# Altium PCB DA1_ver2.PcbDoc
Units mm, origin at the board's own origin, x right, y up, seen from the top; angles counter-clockwise.
Board outline 80.01 x 75.69 mm, 2 copper layers (Top Layer, Bottom Layer); 63 components, 73 nets, 264 pads, 14 vias.
Unrouted connection lines stored in the file: 2.
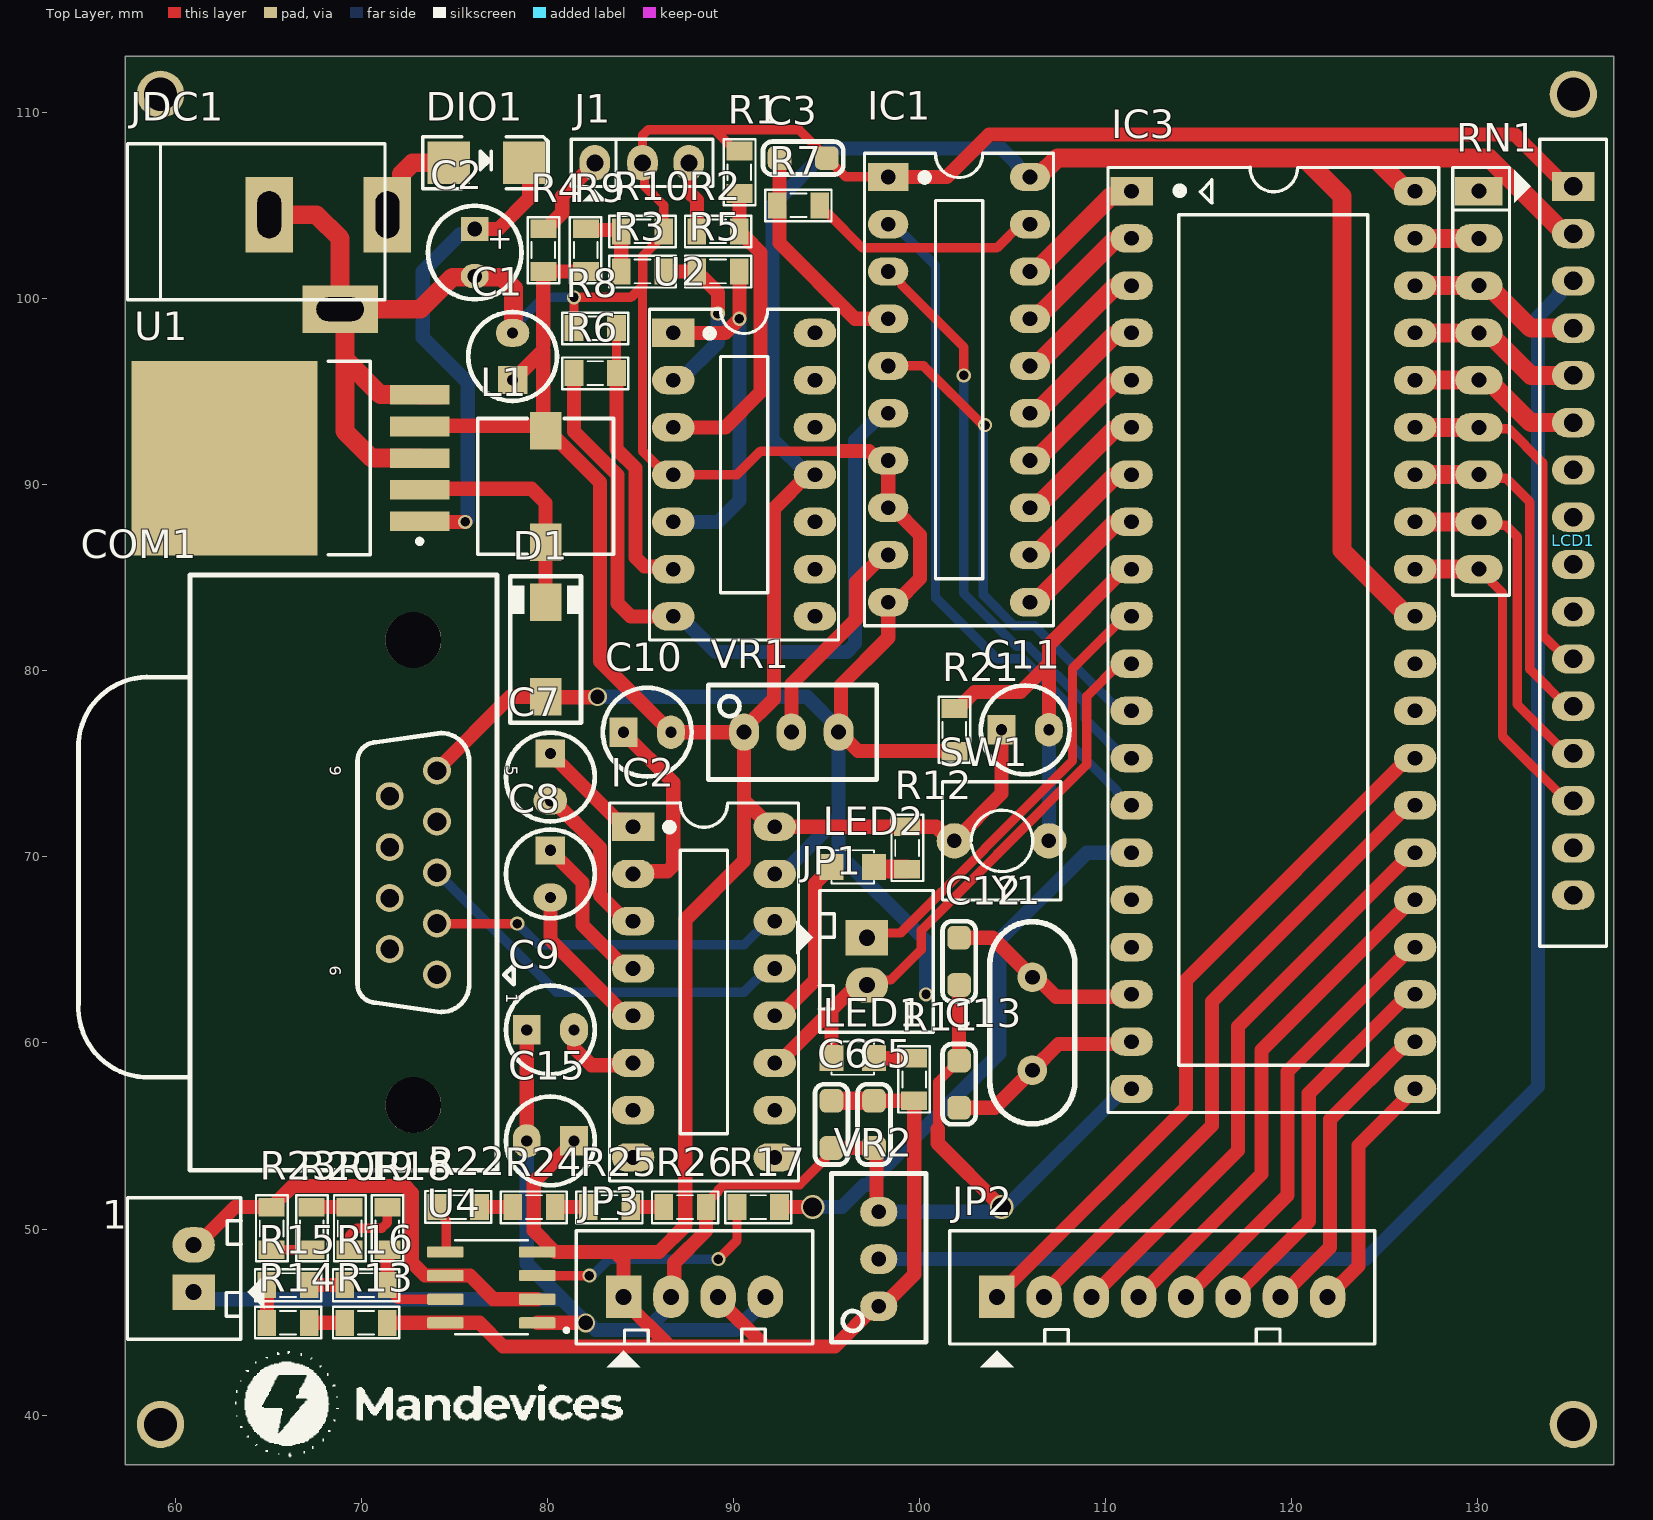
[diagram p0: Top Layer view]
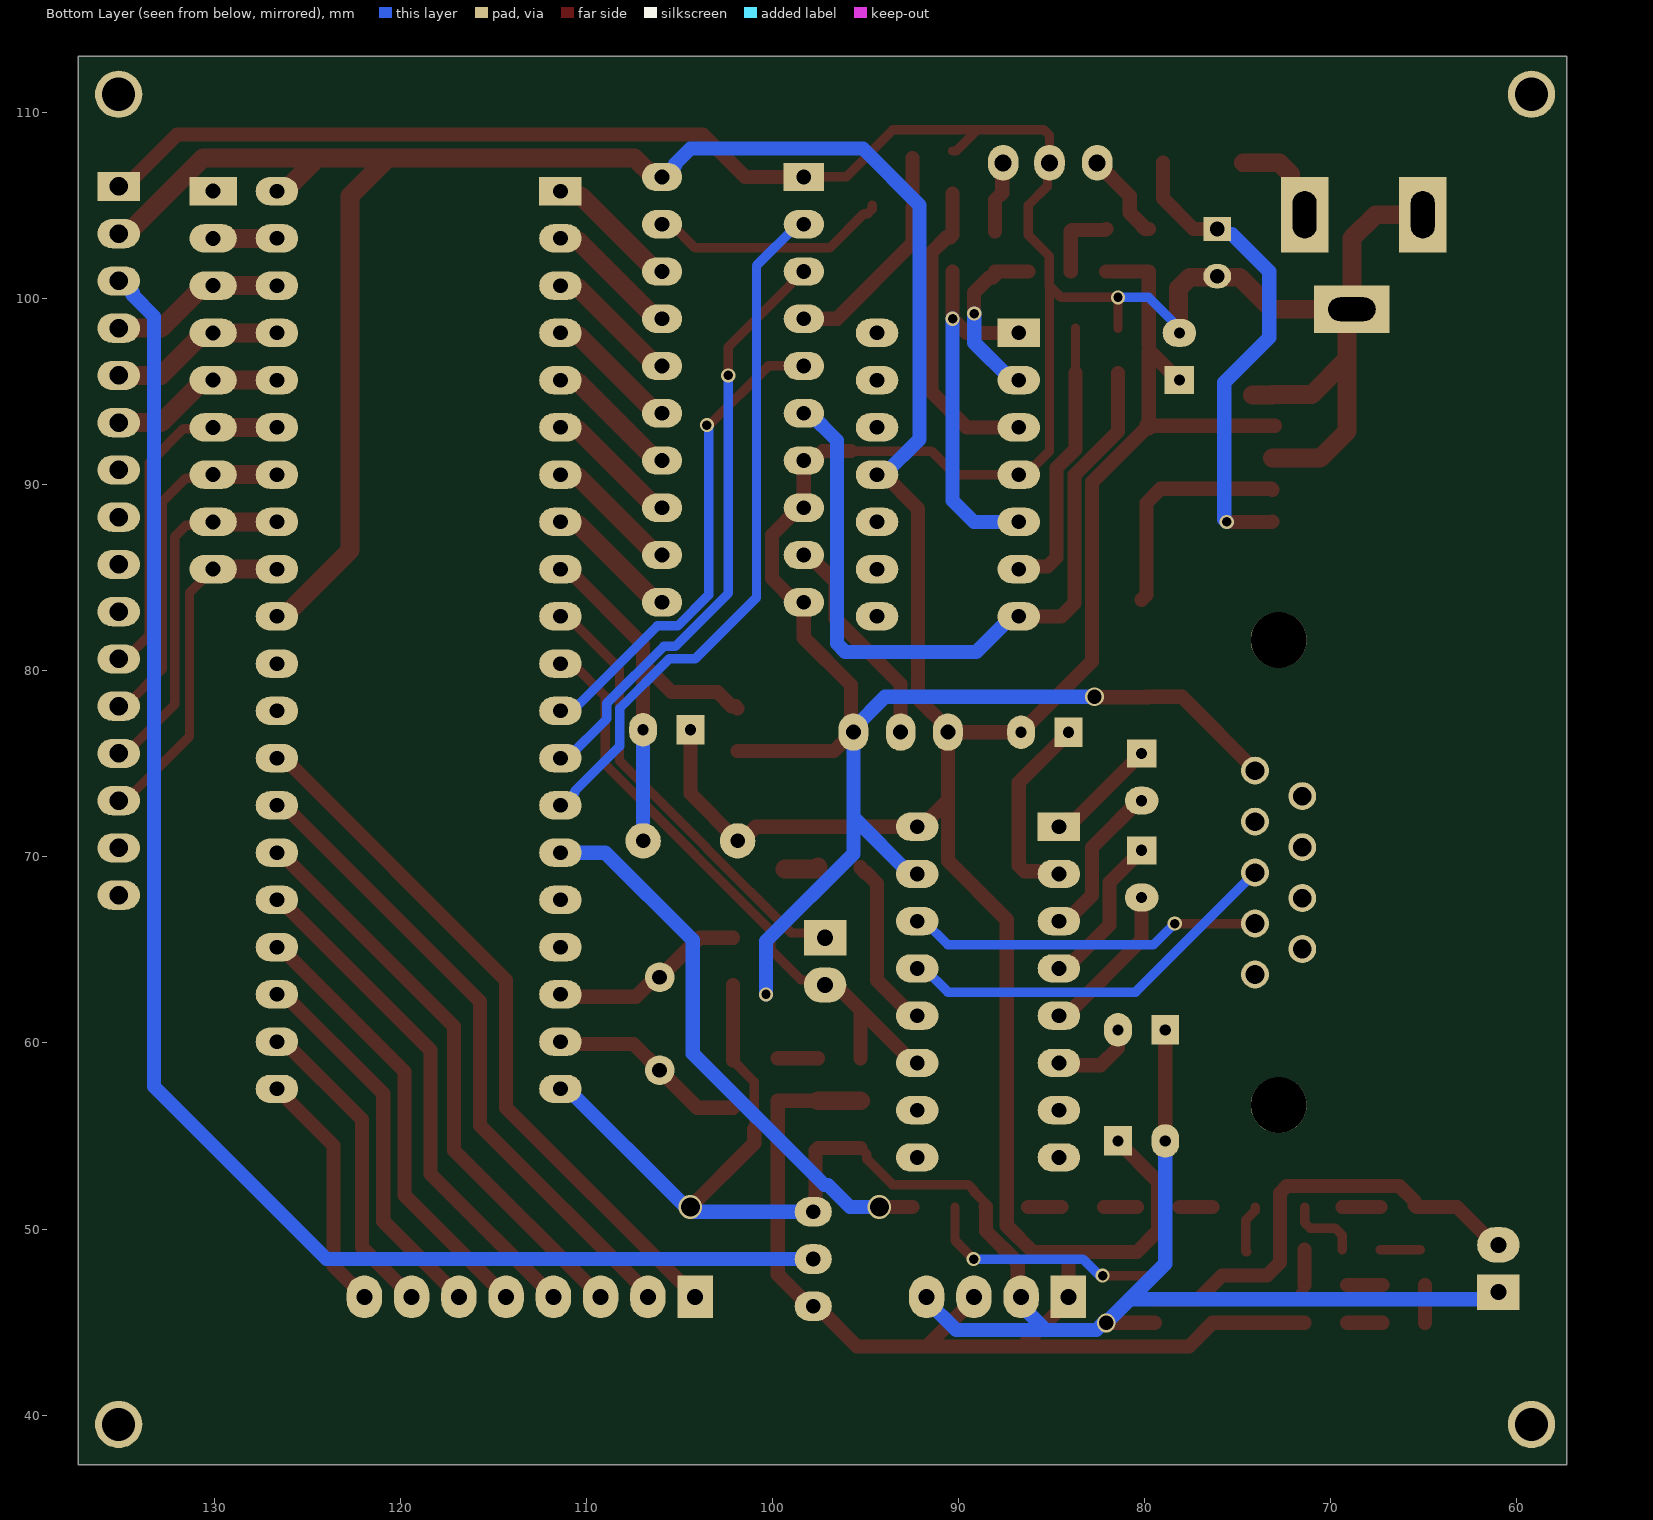
[diagram p1: Bottom Layer view, seen from below]
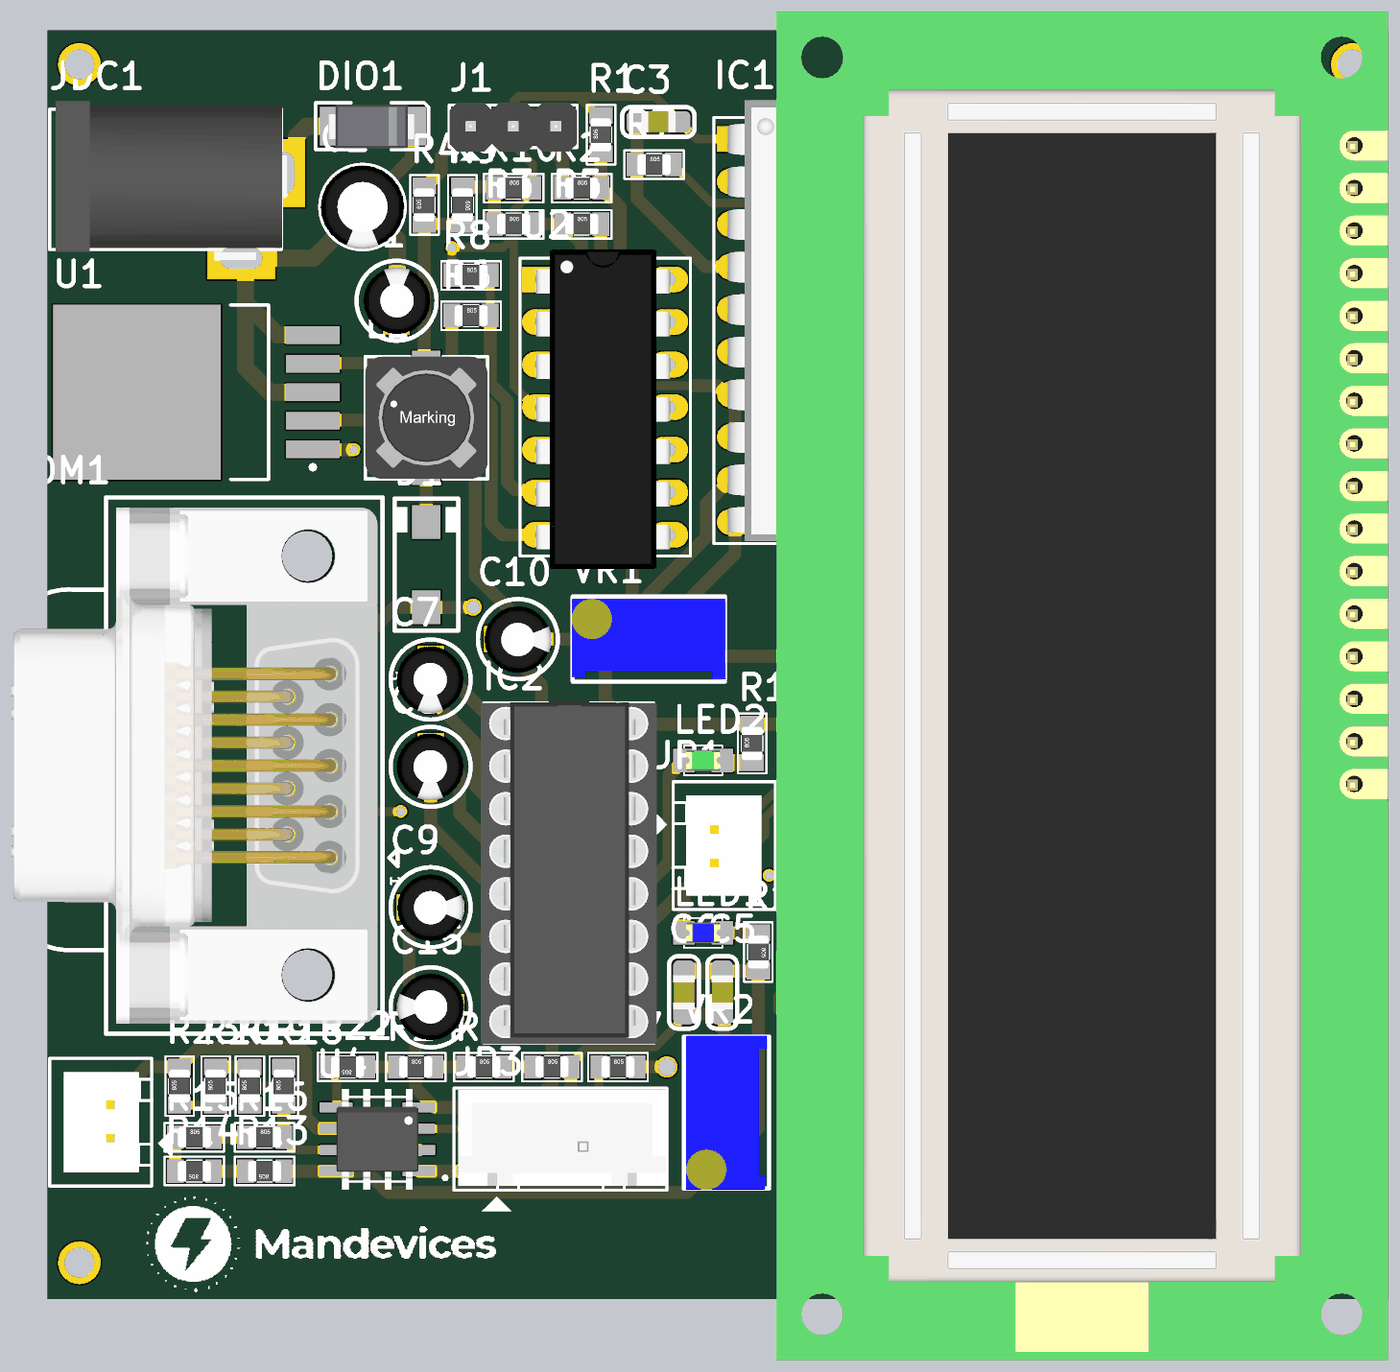
[diagram p2: 3D render of the assembled board from above, using the file's embedded part models]

## Layer stack, top to bottom
Top Solder: solder mask 0.0102, Solder Resist, Dk 3.5
Top Layer: signal copper 0.0356
Dielectric 1: dielectric 0.32, FR-4, Dk 4.8
Bottom Layer: signal copper 0.0356
Bottom Solder: solder mask 0.0102, Solder Resist, Dk 3.5

## Board outline
57.277,37.338 57.277,38.608 57.277,113.03 137.287,113.03 137.287,37.338

## Design rules (kind name [scope] priority, off if disabled: settings)
Clearance [All] p1: gap=0.508 ignorepadtopadclearanceinfootprint=FALSE except(0: Arc-Text Arc-Hole Track-Text Track-Hole SMDPad-Fill SMDPad-Poly SMDPad-Region SMDPad-Text SMDPad-Hole THPad-Text THPad-Hole Via-Text Via-Hole Fill-Text Fill-Hole Poly-Text Poly-Hole Region-Text Region-Hole Text-Text Text-Hole; 0.178: Arc-Arc Arc-Track Track-Track; 0.254: Arc-SMDPad Arc-THPad Arc-Via Track-SMDPad Track-THPad Track-Via SMDPad-SMDPad SMDPad-THPad SMDPad-Via THPad-THPad THPad-Via Via-Via)
PolygonConnect [All] p1: connectstyle=Relief reliefconductorwidth=0.254 reliefentries=4 polygonreliefangle="90 Angle" airgapwidth=0.254
RoutingVias [All] p1: holewidth=0.762 width=1.016 viastyle="Through Hole" minholewidth=0.508 minwidth=0.762 maxholewidth=1.016 maxwidth=1.27
SolderMaskExpansion [All] p1: expansion=0.102 istentingtop=FALSE
Width [All] p1: maxlimit=1.016 minlimit=0.508 preferedwidth=0.762
30 further rules are at their usual default settings.

## Components (designator, comment, footprint, x,y, rotation, side; value= is the part's Value field where it differs from the comment)
1 "HS1101" CON2 60.96,46.609 r90 top value="Connector 2"
C1 "220uF" C3MM 78.105,96.901 r90 top
C2 "680uF" C5mm 76.073,102.489 r270 top
C3 "150pF" CAP_0805 93.726,107.569 r0 top
C5 "104" CAP_0805 97.536,55.626 r90 top value=33p
C6 "104" CAP_0805 95.25,55.626 r90 top value=33p
C7 "10uF/16V" C3MM 80.137,74.295 r270 top
C8 "10uF/16V" C3MM 80.137,69.088 r270 top
C9 "10uF/16V" C3MM 80.137,60.706 r0 top
C10 "10uF/16V" C3MM 85.344,76.708 r0 top
C11 "10uF" C3MM 105.664,76.835 r0 top
C12 "33p" CAP_0805 102.108,64.389 r270 top
C13 "33p" CAP_0805 102.108,57.785 r90 top
C15 "0.1uF" C3MM 80.137,54.737 r180 top
COM1 "COM 9 FMALE" COM9B 72.771,69.161 r270 top value="COM 9"
D1 "1N5822" SMA 79.883,81.153 r90 top value="Diode c?m 1N5408"
DIO1 "Diode SMD" DIO-SMD-106 76.708,107.315 r180 top value=1N5007
IC1 "ADC0804LCN" DIP20/W0.3 98.298,106.553 r270 top
IC2 "MAX232" DIP16/W0.3 84.582,71.628 r270 top
IC3 "AT89C52" DIP40/W0.6 111.379,105.791 r270 top
J1 "Jumper 3" JP3 85.065,107.315 r0 top value=J3
JDC1 "Jac DC" DC-IN 68.199,101.981 r0 top
JP1 "JP2" CON2 97.155,65.659 r270 top value="Connector 2"
JP2 "" CON8 104.14,46.355 r0 top value="Connector 8"
JP3 "JP4" CON4 84.074,46.355 r0 top value="Connector 4"
L1 "33uH" L-SMD-M-7.3x4.5 79.883,89.916 r180 top value="150 mH"
LCD1 "LCD16x2A" LCD16X2N 135.128,106.045 r270 top
LED1 "LED" LED-0805-Blue 97.536,59.182 r180 top value="LED 3 ly Single Colour"
LED2 "LED" LED-0805-Green 97.536,69.469 r180 top value="LED 3 ly Single Colour"
R1 "50k" RES-SMD-0805 90.297,106.807 r90 top
R2 "50k" RES-SMD-0805 89.154,103.632 r0 top
R3 "50k" RES-SMD-0805 85.09,101.473 r0 top
R4 "100" RES-SMD-0805 79.756,102.616 r90 top
R5 "50k" RES-SMD-0805 89.154,101.473 r0 top
R6 "7.5k" RES-SMD-0805 82.55,96.012 r0 top
R7 "10k" RES-SMD-0805 93.472,105.029 r0 top
R8 "1k" RES-SMD-0805 82.55,98.425 r0 top
R9 "100" RES-SMD-0805 82.042,102.616 r270 top
R10 "100" RES-SMD-0805 85.09,103.632 r0 top
R11 "390" RES-SMD-0805 99.695,58.039 r270 top
R12 "390" RES-SMD-0805 99.314,70.485 r90 top
R13 "24k" RES-SMD-0805 70.231,44.958 r180 top
R14 "10k" RES-SMD-0805 66.04,44.958 r180 top
R15 "6.8k" RES-SMD-0805 66.04,46.99 r0 top
R16 "9.1k" RES-SMD-0805 70.231,46.99 r0 top
R17 "1k" RES-SMD-0805 91.313,51.181 r0 top
R18 "270k" RES-SMD-0805 71.374,50.038 r90 top
R19 "270k" RES-SMD-0805 69.342,50.038 r90 top
R20 "36k" RES-SMD-0805 67.31,50.038 r90 top
R21 "10k" RES-SMD-0805 101.854,76.835 r90 top
R22 "360k" RES-SMD-0805 75.184,51.181 r180 top
R23 "20k" RES-SMD-0805 65.151,50.038 r90 top
R24 "360k" RES-SMD-0805 79.248,51.181 r0 top
R25 "150k" RES-SMD-0805 83.312,51.181 r0 top
R26 "39k" RES-SMD-0805 87.376,51.181 r0 top
RN1 "10K" RN8 130.048,105.791 r270 top value="Tro thanh 10K"
SW1 "SW" SW2 106.934,70.866 r180 top value="SW chip 2 pin"
U1 "LM2976" TO-263 67.111,91.44 r180 top
U2 "LF347" DIP14/W0.3 86.741,98.171 r270 top
U4 "TLC555IDR" SOIC127P599X175-8N 76.962,46.863 r180 top
VR1 "10k" VAR_RESISTOR 93.091,76.708 r0 top value="VR 10K"
VR2 "10k" VAR_RESISTOR 97.79,48.387 r90 top value="VR 10K"
Y1 "12Mhz" XTAL 106.045,61.087 r90 top

## Footprints (in the part's own frame and the unit in brackets; to place one, negate y for a bottom-side part, rotate by r counter-clockwise, add the part's x,y. Pads: shape width x height; smd on the part's side, far side on the other; paste and mask are expansions set on the pad)
C3MM [mm]
  rect 1.5x1.58 hole 0.6: 1(-1.27,0)
  oval 1.5x1.8 hole 0.6: 2(1.27,0)
  silkscreen extent -2.39,-2.39 2.39,2.39, body extent -2,-2.03 1.99,1.97, height 7.01
C5mm [mm]
  rect 1.3x1.5 hole 0.8: 1(-1.27,0)
  oval 1.3x1.5 hole 0.8: 2(1.27,0)
  silkscreen extent -2.51,-2.51 2.51,2.51, body extent -2.5,-2.5 2.49,2.5, height 11.01
CAP_0805 [mm]
  rrect50% 1.27x1.27 smd: 1(-1.27,0) 2(1.27,0)
  silkscreen extent -2.16,-0.89 2.16,0.89, body extent -1.01,-0.64 1.01,0.64, height 0.61
COM9B [mm] "D-SUB- 9P, FEMALE, RT ANGLE, TH"
  round 1.5 hole 1 unplated: 1(5.48,1.27) 2(2.74,1.27) 3(0,1.27) 4(-2.74,1.27) 5(-5.48,1.27) 6(4.11,-1.27) 7(1.37,-1.27) 8(-1.37,-1.27) 9(-4.11,-1.27)
  round 3 hole 3 unplated: 10(-12.5,0) 11(12.5,0)
  silkscreen extent -16,-18.01 16,5.4, body extent -15.4,-17.65 15.4,4.2, height 13.2
CON2 [mil] "CON2"
  rect 75x90 hole 34: 1(0,0)
  oval 75x90 hole 34: 2(100,0)
  silkscreen extent -100,-150 200,140, body extent -68,-70 168,107, height 236
CON4 [mil] "CON4"
  rect 75x90 hole 34: 1(0,0)
  oval 75x90 hole 34: 2(100,0) 3(200,0) 4(300,0)
  silkscreen extent -100,-150 400,140, body extent -90,-90 398,136, height 276
CON8 [mil] "CON8"
  rect 75x90 hole 34: 1(0,0)
  oval 75x90 hole 34: 2(100,0) 3(200,0) 4(300,0) 5(400,0) 6(500,0) 7(600,0) 8(700,0)
  silkscreen extent -100,-150 800,140
DC-IN [mil] "Jac DC input"
  rect 100x160 hole 50 slot 100 at 90 deg: 1(125,100) 2(-125,100)
  rect 160x100 hole 50 slot 100 at 0 deg: 3(25,-100)
  silkscreen extent -425,-80 120,250, body extent -410,-105 134,269, height 434
DIO-SMD-106 [mil]
  rect 90x90.55 smd: 1(80,0) 2(-80,0)
  silkscreen extent -130,-55 135,55, body extent -99,-50 106,52, height 95
DIP14/W0.3 [mil] "14PIN, W 300mil, Pin to pin 100mil"
  rect 60x90 hole 31: 1(0,0)
  oval 60x90 hole 31: 2(100,0) 3(200,0) 4(300,0) 5(400,0) 6(500,0) 7(600,0) 8(600,300) 9(500,300) 10(400,300) 11(300,300) 12(200,300) 13(100,300) 14(0,300)
  silkscreen extent -50,-50 650,350, body extent -70,-12 680,302, height 145
DIP16/W0.3 [mil] "16 PIN, W 300mil, Pin to pin 100mil"
  rect 60x90 hole 31: 1(0,0)
  oval 60x90 hole 31: 2(100,0) 3(200,0) 4(300,0) 5(400,0) 6(500,0) 7(600,0) 8(700,0) 9(700,300) 10(600,300) 11(500,300) 12(400,300) 13(300,300) 14(200,300) 15(100,300) 16(0,300)
  silkscreen extent -50,-50 750,350, body extent -52,-57 752,356, height 299
DIP20/W0.3 [mil] "DIP 20, 20 PIN, W 300mil, Pin to pin 100mil"
  rect 60x85 hole 31: 1(0,0)
  oval 60x85 hole 31: 2(100,0) 3(200,0) 4(300,0) 5(400,0) 6(500,0) 7(600,0) 8(700,0) 9(800,0) 10(900,0) 11(900,300) 12(800,300) 13(700,300) 14(600,300) 15(500,300) 16(400,300) 17(300,300) 18(200,300) 19(100,300) 20(0,300)
  silkscreen extent -50,-50 950,350, body extent -91,-18 945,322, height 155
DIP40/W0.6 [mil] "40 PIN, W 600mil, Pin to pin 100mil"
  rect 60x90 hole 31: 1(0,0)
  oval 60x90 hole 31: 2(100,0) 3(200,0) 4(300,0) 5(400,0) 6(500,0) 7(600,0) 8(700,0) 9(800,0) 10(900,0) 11(1000,0) 12(1100,0) 13(1200,0) 14(1300,0) 15(1400,0) 16(1500,0) 17(1600,0) 18(1700,0) 19(1800,0) 20(1900,0) 21(1900,600) 22(1800,600) 23(1700,600) 24(1600,600) 25(1500,600) 26(1400,600) 27(1300,600) 28(1200,600) 29(1100,600) 30(1000,600) 31(900,600) 32(800,600) 33(700,600) 34(600,600) 35(500,600) 36(400,600) 37(300,600) 38(200,600) 39(100,600) 40(0,600)
  silkscreen extent -50,-50 1950,650, body extent -82,-10 1982,600, height 224
JP3 [mil] "Jumper 3"
  oval 65x75 hole 36: 1(-100,0) 2(1,0) 3(99,0)
  silkscreen extent -150,-81 150,50, body extent -150,-60 150,55, height 355
L-SMD-M-7.3x4.5 [mm] "WE-PDA SMD Shielded Power Inductor, 7345"
  rect 1.7x2 smd: 1(0,3) 2(0,-3)
  silkscreen extent -3.65,-3.65 3.65,3.65, body extent -3.65,-3.65 3.65,3.65, height 4.05
LCD16X2N [mil] "LCD dipslay 16x2, 16 pin"
  rect 62x90 hole 39: 1(0,0)
  oval 62x90 hole 39: 2(100,0) 3(200,0) 4(300,0) 5(400,0) 6(500,0) 7(600,0) 8(700,0) 9(800,0) 10(900,0) 11(1000,0) 12(1100,0) 13(1200,0) 14(1300,0) 15(1400,0) 16(1500,0)
  silkscreen extent -100,-125 1608,70, body extent -320,-1353 2850,84, height 764
LED-0805-Blue [mil]
  rect 50x55 smd: 1(0,0) 2(90,0)
  silkscreen extent 0,-35 90,35, body extent 5,-25 85,25, height 43
LED-0805-Green [mil]
  rect 50x55 smd: 1(0,0) 2(90,0)
  silkscreen extent 0,-35 90,35, body extent 5,-25 85,25, height 43
RES-SMD-0805 [mil]
  rect 39.37x55 smd: 1(-45,0) 2(45,0)
  silkscreen extent -70,-34 70,33, body extent -39,-25 39,25, height 31
RN8 [mil] "R SIP8, 9 Pin"
  rect 60x100 hole 32: 1(0,0)
  oval 60x100 hole 32: 2(100,0) 3(200,0) 4(300,0) 5(400,0) 6(500,0) 7(600,0) 8(700,0) 9(800,0)
  silkscreen extent -50,-55 855,65, body extent -43,-20 843,29, height 219
SMA [mm]
  rect 2x1.7 smd: 1(-2.544,0) 2(2.544,0)
  silkscreen extent -3.94,-1.9 3.94,1.91, body extent -2.87,-1.4 2.87,1.4, height 2.29
SOIC127P599X175-8N [mm]
  rrect25% 1.97x0.6 smd: 1(-2.47,1.905) 2(-2.47,0.635) 3(-2.47,-0.635) 4(-2.47,-1.905) 5(2.47,-1.905) 6(2.47,-0.635) 7(2.47,0.635) 8(2.47,1.905)
  silkscreen extent -4.14,-2.52 1.95,2.52, body extent -2.45,-3 2.45,3, height 1.75
SW2 [mil] "SW button 2pin, 250x 250 mil"
  round 75 hole 31: 1(0,0) 2(200,0)
  silkscreen extent -25,-125 225,125
TO-263 [mm]
  rect 3.2x1.05 smd: 1(-6,3.4) 2(-6,1.7) 3(-6,0) 4(-6,-1.7) 5(-6,-3.4)
  rect 10x10.45 smd: 6(4.5,0)
  silkscreen extent -6.13,-5.2 -1.1,5.2, body extent -6.58,-5.2 7.57,5.2, height 4.65
VAR_RESISTOR [mm]
  oval 1.6x2 hole 0.8: 1(-2.54,0) 2(0,0) 3(2.54,0)
  silkscreen extent -4.47,-2.54 4.6,2.54, body extent -4.54,-2.4 4.66,2.4, height 12.02
XTAL [mm]
  round 1.6 hole 0.8: 1(-2.552,0.001) 2(2.448,0.001)
  silkscreen extent -5.44,-2.29 5.44,2.29, body extent -5.55,-2.32 5.62,2.35, height 3.63

## Part data
1 JP1: library part Con2, "Connector 2"
C1 C2 C7 C8 C9 C10 C11 C15: library part "Cap Pol", "Polarized Capacitor (Axial)", LatestRevisionDate=17-Jul-2002, LatestRevisionNote="Re-released for DXP Platform.", PackageReference=POLAR0.8, Published=8-Jun-2000, Publisher="Altium Limited"
C3: library part "Tu 0805 220nF 50V 10%", "Dán", Chung_Loai=Dán, Don_Vi=Con, Ma_Hang=MH008099, So_Chan=2, Ten_Linh_Kien="Tụ 0805 220nF 50V 10%"
C5 C6 C12 C13: library part CapSMD, "Capacitor", LatestRevisionDate=17-Jul-2002, LatestRevisionNote="Re-released for DXP Platform.", PackageReference=RAD-0.3, Published=8-Jun-2000, Publisher="Altium Limited"
COM1: library part COM9F, "COM 9", PackageDocument=O, DatasheetDocument=1-Sep-1999, Gender=Receptacle, LatestRevisionDate=17-Jul-2002, LatestRevisionNote="Re-released for DXP Platform.", Orientation="Right Angle", PackageReference=788750, Positions=9, Published=15-Jun-2001, Publisher="Altium Limited"
D1: "Schottky Rectifiers"
DIO1: "Default Diode", Code - JEDEC=DO-214-AB, Published=8-Jun-2000, Publisher="Altium Limited", Revision="July-2002: Re-released for DXP Platform."
IC1: library part ADC0804, "Cắm", Chung_Loai=Cắm, Don_Vi=Con, Ma_Hang=MH002626, Ten_Linh_Kien="ADC0804LCN DIP20"
IC2: "Dual EIA-232 Driver/Receiver"
IC3: "Atmel AT89C52, 8k Byte Flash Memory , 40 Pin"
J1: library part JP3
JDC1: library part DCIN, "Jac DC input"
JP2: library part Con8, "Connector 8"
JP3: library part Con4, "Connector 4"
L1: library part Inductor, "Inductor"
LCD1: library part LCD16x2, "LCD dipslay 16 char, 2 line"
LED1 LED2: "LED Single colour Green and Red"
R1 R2 R3 R4 R5 R6 R8 R9 R10: library part "Tro 0805 5% 82k", "Dán", Chung_Loai=Dán, Don_Vi=Con, Ma_Hang=MH005329, So_Chan=2, Ten_Linh_Kien="Trở 0805 5% 82k"
R7: library part "Tro 0805 5% 10k", "Dán", Chung_Loai=Dán, Don_Vi=Con, Ma_Hang=MH005239, So_Chan=2, Ten_Linh_Kien="Trở 0805 5% 10k"
R11 R12: library part "Resistor - SMD", "Resistor", Manufacturer="Generic Components", Class=Passive, Published=08/06/2000, Publisher="Altium Hobart Technology Centre"
R13 R14 R15 R16 R18 R19 R21 R23 R24 R25 R26: library part "Resistor - SMD", "Resistor SMD", Manufacturer="Generic Components", Class=Passive, Published=08/06/2000, Publisher="Altium Hobart Technology Centre"
R17: library part "Tro 0805 1% 1k", "Dán", Chung_Loai=Dán, Don_Vi=Con, Ma_Hang=MH005468, So_Chan=2, Ten_Linh_Kien="Trở 0805 1% 1k"
R20: library part "Tro 0805 5% 510k", "Dán", Chung_Loai=Dán, Don_Vi=Con, Ma_Hang=MH007566, So_Chan=2, Ten_Linh_Kien="Trở 0805 5% 510k"
R22: library part "Tro 0805 5% 1M", "Dán", Chung_Loai=Dán, Don_Vi=Con, Ma_Hang=MH005235, So_Chan=2, Ten_Linh_Kien="Trở 0805 5% 1M"
RN1: library part RN8, "Resistor 8 (Thanh)"
SW1: library part SW2, "Switch button 2 pin"
U1: library part LM2596, Max Input Voltage="12 V", Max Output Current="3 (6.0 peak) A", Max Output Voltage=mV, Temperature Range="-40 to +125 degC", Category=IC-Power, Min Input Voltage=mV, Min Output Voltage=mV, Mounting Technology="Surface Mount", Status=Unreleased, Supply Voltage=mV
U2: "Low Power Quad Operational Amplifier", Current - Input Bias=50pA, Current - Output / Channel=-, Current - Supply=8mA, Manufacturer="Texas Instruments", Manufacturer Part Number=LF347BD, Operating Temperature="0°C ~ 70°C", Package / Case="14-SOIC (3.9mm Width), 14-SOL", Supplier Part Number=296-7136-5-ND, Voltage - Input Offset=3000µV, Voltage - Supply, Single/Dual (±)="7 V ~ 36 V, ±3.5 V ~ 18 V", Amplifier Type=J-FET, Category="Integrated Circuits (ICs)", Gain Bandwidth Product=3MHz, Number of Circuits=4, Output Type=-, Packaging=Tube, RoHS="RoHS Compliant", Slew Rate="13 V/µs", Supplier=Digi-Key, Supplier 1=Digi-Key, Supplier Part Number 1=296-7136-5-ND, Text Field1=pristel=Nsc\nsanopea\<parttype>.ckt
U4: "2.1-MHz, 250-A, Low-Power Timer 8-SOIC -40 to 85", Package="SOIC-8 Texas Instruments", Availability=Good, MF="Texas Instruments", MP=TLC555IDR, Price=None, Purchase-URL=https://pricing.snapeda.com/search/part/TLC555IDR/?ref=eda, SnapEDA_Link=https://www.snapeda.com/parts/TLC555IDR/Texas%20Instruments/view-part/46238/?ref=snap
VR1 VR2: library part VR, "Var Resistor"
Y1: library part XTAL, "Crystal Oscillator", LatestRevisionDate=17-Jul-2002, LatestRevisionNote="Re-released for DXP Platform.", PackageReference=R38, Published=8-Jun-2000, Publisher="Altium Limited"

## Free pads (board coordinates)
  round 2.54 hole 1.778: 8(59.182,110.998) 9(59.182,39.497) 10(135.128,39.497) 11(135.128,110.998)

## Via types
v1: diameter 0.762, hole 0.508, Top Layer to Bottom Layer, 10 vias
v2: diameter 1.016, hole 0.762, Top Layer to Bottom Layer, 2 vias
v3: diameter 1.27, hole 1.016, Top Layer to Bottom Layer, 2 vias

## Nets (pads, with @x,y where several pads share a name; then routed paths per layer and width w, separated by ;. In a path a pad name is that pad's centre, name@x,y a point inside that pad or via, vN(x,y) a via of type N, cw(c..) or ccw(c..) an arc to the next point about the centre after c; other vN are vias at no path point)
ADC0: IC1.18 IC3.1 | length 7.2
  Top Layer w1.016: IC1.18 106.236,101.473 110.299,105.537 111.125,105.537 IC3.1
ADC1: IC1.17 IC3.2 | length 7.2
  Top Layer w1.016: IC1.17 106.236,98.933 110.456,103.154 111.282,103.154 IC3.2
ADC2: IC1.16 IC3.3 | length 7.2
  Top Layer w1.016: IC1.16 106.236,96.393 110.456,100.614 111.282,100.614 IC3.3
ADC3: IC1.15 IC3.4 | length 7.2
  Top Layer w1.016: IC1.15 106.236,93.853 110.456,98.074 111.282,98.074 IC3.4
ADC4: IC1.14 IC3.5 | length 7.2
  Top Layer w1.016: IC1.14 106.236,91.313 110.456,95.534 111.282,95.534 IC3.5
ADC5: IC1.13 IC3.6 | length 7.2
  Top Layer w1.016: IC1.13 106.236,88.773 110.456,92.994 111.282,92.994 IC3.6
ADC6: IC1.12 IC3.7 | length 7.2
  Top Layer w1.016: IC1.12 106.236,86.233 110.456,90.454 111.282,90.454 IC3.7
ADC7: IC1.11 IC3.8 | length 7.2
  Top Layer w1.016: IC1.11 106.236,83.693 110.456,87.914 111.282,87.914 IC3.8
ENABLE: IC3.36 LCD1.6 RN1.5 | length 9.5
  Top Layer w1.016: IC3.36 RN1.5 130.556,95.631 132.842,93.345 LCD1.6
GND: 1.1 C1.2 C2.2 C3.2 C5.1 C6.1 C9.1 C12.2 C13.2 C15.2 COM1.5 D1.1 IC1.1 IC1.7 IC1.8 IC1.10 IC2.15 IC3.20 J1.2 JDC1.2 JDC1.3 JP3.2 JP3.4 LCD1.1 R1.2 R8.1 R10.2 R21.1 R26.2 U1.3 U1.5 U2.4 U4.1 VR1.3 VR2.3 | length 307.4
  Top Layer w0.508: R8.1 v1(81.407,100.076) 84.467,100.076 85.09,100.699 ; J1.2@84.607,107.442 85.197,106.853 85.197,106.065 86.233,105.029 R10.2 86.233,103.434 85.103,102.303 85.103,100.712 85.09,100.699 ; J1.2 85.09,108.795 85.388,109.093 88.955,109.093 ; R26.2 88.519,51.379 89.124,51.985 89.124,52.052 89.46,52.387 93.535,52.387 94.908,53.76 94.908,54.014 C6.1 ; R1.2 90.099,107.95 88.955,109.093 ; 95.758,91.821 91.44,91.821 90.17,90.551 U2.4 86.36,90.551 85.09,91.821 85.09,100.699 ; IC1.1 96.012,106.553 C3.2 94.996,107.603 93.506,109.093 88.955,109.093 ; 100.965,55.372 100.965,57.912 C13.2
  Top Layer w0.762: COM1.5 74.041,74.676 77.974,78.609 D1.1 ; C15.2 C9.1 C9.1@78.867,60.926 ; U4.1 v2(82.042,44.958) ; D1.1@79.781,78.588 82.652,78.588 v2(82.677,78.613) ; JP3.2 86.794,46.535 86.794,48.186 88.509,49.901 88.509,51.171 R26.2 ; C6.1 C5.1 97.663,54.229 97.663,51.054 VR2.3 ; 95.758,91.821 97.266,91.821 97.774,91.313 IC1.7 IC1.8 98.552,88.773 100.013,87.312 100.013,84.965 98.741,83.693 IC1.10 98.298,81.788 95.758,79.248 95.758,76.835 VR1.3 95.658,76.708 96.674,75.692 R21.1 ; IC1.1 101.441,106.553 103.727,108.839 131.978,108.839 134.772,106.045 LCD1.1 ; 100.965,55.372 100.965,54.61 v3(104.394,51.181) ; C13.2 C12.2
  Top Layer w1.016: JDC1.2 67.564,104.521 68.834,103.251 JDC1.3 ; U1.3 70.54,91.44 69.088,92.892 69.088,96.774 ; U1.5@74.186,94.84 U1.5 73.094,94.857 71.005,94.857 69.088,96.774 ; C1.2@77.978,98.395 78.148,98.395 78.148,100.569 77.553,101.165 75.873,101.165 75.819,101.219 75.765,101.165 74.876,101.165 73.152,99.441 JDC1.3 ; JDC1.3 69.088,99.187 69.088,96.774
  Bottom Layer w0.508: C1.2@77.978,98.425 78.105,98.425 79.756,100.076 v1(81.407,100.076)
  Bottom Layer w0.762: 1.1 61.341,46.228 80.772,46.228 ; C15.2 78.867,48.133 80.772,46.228 ; v2(82.677,78.613) 93.926,78.613 95.631,76.908 VR1.3 95.631,72.136 ; JP3.2 86.614,45.901 85.29,44.577 ; JP3.4 91.694,46.164 90.106,44.577 85.29,44.577 ; IC2.15 92.583,69.088 95.631,72.136 ; VR2.3 v3@104.394,50.927 ; v1(100.33,62.611) 100.33,65.478 95.631,70.177 95.631,72.136 ; v3(104.394,51.181) 104.491,51.278 104.745,51.278 110.998,57.531 IC3.20 ; 80.772,46.228 v2(82.042,44.958) 82.179,44.958 82.56,44.577 85.29,44.577
HS1101_COUNTER: IC3.15 R17.2 | length 30.4
  Top Layer w0.762: R17.2 v3(94.234,51.181)
  Bottom Layer w0.762: v3(94.234,51.181) 95.815,51.181 96.996,52.362 97.193,52.362 104.267,59.436 104.267,65.532 108.966,70.231 IC3.15
INTR_ADC: IC1.5 IC3.12 | length 26.2
  Top Layer w0.508: IC1.5 100.203,96.393 103.378,93.218 v1(103.505,93.218)
  Bottom Layer w0.508: v1(103.505,93.218) 103.416,93.129 103.416,84.082 105.074,82.423 106.172,82.423 110.744,77.851 IC3.12
Net1_2: 1.2 R23.2 U4.2 U4.6 | length 24.6
  Top Layer w0.762: 1.2 61.151,49.149 63.182,51.181 65.349,51.181 65.468,51.3 65.468,51.498 66.286,52.316 72.336,52.316 72.707,51.944 72.707,48.197 73.406,47.498 U4.6 75.819,47.498 77.089,46.228 U4.2
NetC2_1: C2.1 DIO1.2 U1.1 | length 26.9
  Top Layer w0.762: U1.1 73.14,88.011 v1(75.565,88.011) ; C2.1@75.704,103.49 75.973,103.759 76.173,103.759 C2.1 ; C2.1@75.819,103.759 77.343,103.759 78.994,105.41 DIO1.2@78.994,107.315
  Bottom Layer w0.762: v1(75.565,88.011) 75.692,88.138 75.692,95.504 73.279,97.917 73.279,101.473 75.296,103.49 75.55,103.49 C2.1@75.819,103.759
NetC3_1: C3.1 IC1.4 R7.1 | length 11.8
  Top Layer w0.762: R7.1 92.448,104.91 92.448,103.005 96.52,98.933 IC1.4 ; R7.1@92.456,105.355 C3.1
NetC7_1: C7.1 IC2.1 | length 6.1
  Top Layer w0.762: C7.1 80.177,75.565 80.546,75.196 80.546,75.156 83.693,72.009 84.201,72.009 IC2.1
NetC7_2: C7.2 IC2.3 | length 8.6
  Top Layer w0.762: C7.2 80.289,73.025 82.804,70.51 82.804,69.401 82.804,67.945 84.201,66.548 IC2.3
NetC8_1: C8.1 IC2.4 | length 8.4
  Top Layer w0.762: C8.1 80.177,70.358 80.546,69.989 80.546,69.949 81.864,68.631 81.864,66.345 84.201,64.008 IC2.4
NetC8_2: C8.2 IC2.5 | length 8.8
  Top Layer w0.762: C8.2@80.137,68.199 80.137,65.532 84.201,61.468 IC2.5
NetC9_2: C9.2 IC2.6 | length 4.6
  Top Layer w0.762: C9.2 81.407,59.74 82.346,58.801 84.455,58.801 IC2.6
NetC10_1: C10.1 IC2.2 | length 10.6
  Top Layer w0.762: C10.1 84.074,76.668 86.741,74.001 86.741,69.534 86.44,69.234 84.728,69.234 IC2.2
NetCOM1_2: COM1.2 IC2.14 | length 19.2
  Top Layer w0.508: COM1.2 v1(78.359,66.421)
  Bottom Layer w0.508: v1(78.359,66.421) 79.502,65.278 90.551,65.278 91.821,66.548 IC2.14
NetCOM1_3: COM1.3 IC2.13 | length 21.3
  Bottom Layer w0.508: COM1.3 80.464,62.738 90.551,62.738 91.821,64.008 IC2.13
NetD1_2: D1.2 L1.1 U1.2 | length 12.4
  Top Layer w0.762: U1.2 73.16,89.789 79.121,89.789 79.883,89.027 79.883,87.218 79.883,84.078 D1.2@80.137,83.824
NetDIO1_1: DIO1.1 JDC1.1 | length 5.3
  Top Layer w1.016: JDC1.1 72.136,105.283 72.136,106.72 72.731,107.315 DIO1.1
NetIC1_19: IC1.19 R7.2 | length 12.9
  Top Layer w0.508: R7.2 94.615,104.831 94.861,104.584 95.059,104.584 96.901,102.743 104.14,102.743 105.41,104.013 IC1.19
NetIC3_39: IC3.39 RN1.2 | length 3.4
  Top Layer w1.016: IC3.39 RN1.2
NetJ1_1: J1.1 R4.2 | length 4.8
  Top Layer w0.762: R4.2 79.954,103.759 80.073,103.878 80.073,103.931 80.772,104.63 80.772,105.537 82.525,107.29 J1.1
NetJ1_3: J1.3 R2.1 | length 3.9
  Top Layer w0.762: J1.3 87.63,107.264 87.63,105.698 88.011,105.317 R2.1
NetLED1_1: LED1.1 R11.1 | length 2.2
  Top Layer w0.762: LED1.1 R11.1
NetLED2_1: LED2.1 R12.1 | length 1.8
  Top Layer w1.016: LED2.1 97.655,69.35 99.306,69.35 R12.1
NetR1_1: R1.1 R2.2 U2.3 | length 16.7
  Top Layer w0.762: U2.3 89.535,93.091 91.44,94.996 91.44,102.489 90.614,103.314 90.416,103.314 90.297,103.434 R2.2 R1.1
NetR3_1: R3.1 R9.1 R10.1 | length 4.1
  Top Layer w0.762: R9.1 82.106,103.696 83.883,103.696 R10.1 R3.1
NetR3_2: R3.2 R5.1 U2.2 | length 10
  Top Layer w0.762: U2.2@86.171,95.631 U2.2 ; R3.2 R5.1 88.011,101.275 88.13,101.155 88.328,101.155 89.154,100.33 89.154,99.227 v1(89.134,99.207)
  Bottom Layer w0.762: U2.2 87.122,95.631 89.134,97.643 v1(89.134,99.207)
NetR5_2: R5.2 U2.1 U2.5 | length 20.2
  Top Layer w0.762: U2.1 89.535,98.171 v1(90.297,98.933) R5.2
  Bottom Layer w0.762: U2.5 89.154,88.011 90.297,89.154 v1(90.297,98.933)
NetR6_2: R6.2 R8.2 U2.6 | length 15
  Top Layer w0.508: R6.2 R8.2
  Top Layer w0.762: R6.2 83.693,91.916 84.709,90.9 84.709,86.106 85.198,85.617 86.595,85.617 U2.6
NetR13_2: R13.2 R14.1 | length 1.9
  Top Layer w0.762: R14.1 R13.2
NetR14_2: R14.2 R15.1 | length 2
  Top Layer w0.762: R14.2 R15.1
NetR15_2: R15.2 R16.1 | length 1.9
  Top Layer w0.762: R15.2 R16.1
NetR16_2: R16.2 R18.1 U4.7 | length 5.5
  Top Layer w0.508: R16.2 71.374,46.792 71.937,46.228 U4.7
  Top Layer w0.762: R16.2 R18.1
NetR17_1: R17.1 U4.3 | length 13.3
  Top Layer w0.508: U4.3 v1(82.233,47.498) ; v1(89.172,48.387) 90.17,49.385 R17.1
  Bottom Layer w0.508: v1(82.233,47.498) 82.403,47.498 83.292,48.387 v1(89.172,48.387)
NetR18_2: R18.2 R19.1 | length 3.9
  Top Layer w0.508: R19.1 69.342,49.657 69.723,50.038 71.076,50.038 71.374,50.336 R18.2
NetR19_2: R19.2 R20.2 | length 2
  Top Layer w0.762: R20.2 R19.2
NetR20_1: R20.1 R23.1 | length 2.2
  Top Layer w0.508: R23.1 R20.1
NetR22_1: R22.1 R24.1 | length 1.8
  Top Layer w0.762: R22.1 R24.1
NetR22_2: R22.2 U4.5 | length 2.7
  Top Layer w0.508: R22.2 74.041,50.983 74.549,50.475 74.549,48.814 74.503,48.768 U4.5
NetR24_2: R24.2 R25.1 | length 1.8
  Top Layer w0.762: R24.2 R25.1
NetR25_2: R25.2 R26.1 | length 1.8
  Top Layer w0.762: R25.2 R26.1
P0_4: IC3.35 LCD1.11 RN1.6 | length 19.1
  Top Layer w0.508: RN1.6 130.11,93.029 131.634,93.029 133.477,91.186 133.477,81.94 134.772,80.645 LCD1.11
  Top Layer w1.016: IC3.35 RN1.6
P0_5: IC3.34 LCD1.12 RN1.7 | length 18.9
  Top Layer w0.508: RN1.7 130.237,90.362 131.507,90.362 132.791,89.078 132.791,80.086 134.772,78.105 LCD1.12
  Top Layer w1.016: IC3.34 RN1.7
P0_6: IC3.33 LCD1.13 RN1.8 | length 18.9
  Top Layer w0.508: RN1.8 130.237,87.822 131.507,87.822 132.105,87.224 132.105,78.207 134.747,75.565 LCD1.13
  Top Layer w1.016: IC3.33 RN1.8
P0_7: IC3.32 LCD1.14 RN1.9 | length 18.3
  Top Layer w0.508: RN1.9 130.281,85.471 130.75,85.002 130.75,84.769 131.318,84.201 131.318,76.479 134.772,73.025 LCD1.14
  Top Layer w1.016: IC3.32 RN1.9
P2_0: IC3.21 JP2.8 | length 13.1
  Top Layer w0.762: JP2.8 123.571,48.006 123.571,54.483 IC3.21
P2_1: IC3.22 JP2.7 | length 16.9
  Top Layer w0.762: JP2.7 122.047,49.022 122.047,55.88 126.238,60.071 IC3.22
P2_2: IC3.23 JP2.6 | length 20.5
  Top Layer w0.762: JP2.6 120.904,50.419 120.904,57.277 126.238,62.611 IC3.23
P2_3: IC3.24 JP2.5 | length 24
  Top Layer w0.762: JP2.5 119.761,51.816 119.761,58.468 125.857,64.564 126.444,65.151 IC3.24
P2_4: IC3.25 JP2.4 | length 27.6
  Top Layer w0.762: JP2.4 118.364,52.959 118.364,59.611 126.444,67.691 IC3.25
P2_5: IC3.26 JP2.3 | length 31.2
  Top Layer w0.762: JP2.3 117.094,54.229 117.094,60.881 125.857,69.644 126.444,70.231 IC3.26
P2_6: IC3.27 JP2.2 | length 34.9
  Top Layer w0.762: JP2.2 106.68,46.545 115.697,55.562 115.697,62.23 126.238,72.771 IC3.27
P2_7: IC3.28 JP2.1 | length 38.6
  Top Layer w0.762: JP2.1 104.14,46.545 104.712,47.117 104.902,47.117 114.3,56.515 114.3,63.373 126.238,75.311 IC3.28
RD_ADC: IC1.2 IC3.14 | length 37.7
  Bottom Layer w0.508: IC1.2 98.615,104.013 100.84,101.789 100.84,83.945 104.14,80.645 105.537,80.645 108.192,77.99 108.192,75.958 110.619,73.531 110.619,73.425 111.273,72.771 IC3.14
RS_LCD: IC3.38 LCD1.4 RN1.3 | length 9.5
  Top Layer w1.016: IC3.38 RN1.3 130.556,100.711 132.842,98.425 LCD1.4
RST: C11.2 IC3.9 R21.2 SW1.1 | length 22.7
  Top Layer w0.762: R21.2 101.973,78.097 102.171,78.097 102.942,78.867 105.41,78.867 106.934,80.391 ; C11.2 106.934,80.391 ; IC3.9 110.998,85.471 106.934,81.407 106.934,80.391
  Bottom Layer w0.762: SW1.1 C11.2
RW_LCD: IC3.37 LCD1.5 RN1.4 | length 9.5
  Top Layer w1.016: IC3.37 RN1.4 130.556,98.171 132.842,95.885 LCD1.5
RXD: IC2.12 IC3.10 JP1.1 LED2.2 | length 33.7
  Top Layer w0.508: JP1.1 97.409,65.913 98.966,65.913 103.483,70.43 103.483,70.451 108.204,75.171 108.204,80.137 110.998,82.931 IC3.10
  Top Layer w0.762: IC2.12 92.456,61.468 94.361,63.373 94.361,68.58 94.932,69.151 94.996,69.151 95.25,69.406 LED2.2
TXD: IC2.11 IC3.11 JP1.2 LED1.2 | length 33.4
  Top Layer w0.508: JP1.2 97.422,63.386 98.438,63.386 100.076,65.024 100.076,66.053 104.169,70.146 104.169,70.166 108.966,74.963 108.966,78.634 110.723,80.391 IC3.11
  Top Layer w0.762: IC2.11 92.405,58.928 95.25,61.773 ; LED1.2 95.25,61.773 ; JP1.2 96.936,62.9 96.378,62.9 95.25,61.773
V_PT100: IC1.6 R6.1 U2.7 | length 40.7
  Top Layer w0.762: R6.1 81.407,92.873 83.744,90.536 83.744,83.642 84.455,82.931 U2.7
  Bottom Layer w0.762: U2.7 87.122,82.931 89.027,81.026 96.074,81.026 96.52,81.472 96.52,92.392 97.98,93.853 IC1.6
VCC: C1.1 C5.2 C6.2 C10.2 C11.1 C15.1 IC1.20 IC2.16 IC3.31 IC3.40 JP3.1 JP3.3 L1.2 LCD1.2 R4.1 R9.2 R11.2 R12.2 R13.1 RN1.1 SW1.2 U1.4 U2.11 U4.4 U4.8 VR1.1 VR2.1 | length 267.5
  Top Layer w0.762: R13.1 U4.8 76.327,44.958 77.597,43.688 86.55,43.688 ; U1.4@72.968,93.179 79.59,93.179 L1.2@79.756,93.345 ; C1.1 78.474,96 78.522,96 79.756,97.234 L1.2@79.756,93.043 ; 79.756,97.536 R4.1 R9.2 ; L1.2@79.883,93.218 79.883,93.068 82.804,90.147 82.804,80.518 C10.2 VR1.1 ; C15.1 81.407,54.697 79.24,52.53 79.24,49.919 80.391,48.768 83.628,48.768 ; JP3.1@84.074,46.164 86.55,43.688 ; JP3.1 84.074,48.322 83.628,48.768 ; JP3.3 89.154,46.228 91.694,43.688 ; U2.11 93.98,90.551 92.151,88.722 92.151,78.508 90.551,76.908 VR1.1 ; C5.2 R11.2 99.695,47.552 97.99,45.847 VR2.1 97.59,45.847 95.431,43.688 91.694,43.688 ; C11.1 104.394,73.406 SW1.2 101.642,70.866 100.88,71.628 R12.2 IC2.16 91.975,71.628 90.551,73.052 ; 83.628,48.768 85.979,48.768 87.384,50.173 87.384,66.627 90.551,69.794 90.551,73.052 ; 86.55,43.688 91.694,43.688 ; 90.551,73.052 VR1.1
  Top Layer w1.016: C6.2 C5.2 ; IC1.20 106.373,106.553 107.389,107.569 120.65,107.569 ; IC3.31 126.238,82.931 122.682,86.487 122.682,105.537 120.65,107.569 ; IC3.40 126.238,105.791 124.46,107.569 ; LCD1.2 134.66,103.505 130.596,107.569 124.46,107.569 ; 120.65,107.569 124.46,107.569
  Bottom Layer w0.762: U2.11 93.98,90.551 92.075,92.456 92.075,105.029 95.123,108.077 104.394,108.077 105.219,107.251 105.219,107.14 105.807,106.553 IC1.20
VREF/2: IC1.9 VR1.2 | length 11.8
  Top Layer w0.762: VR1.2 93.091,79.304 96.584,82.797 96.584,84.772 98.044,86.233 IC1.9
VS_LCD: LCD1.3 VR2.2 | length 83.4
  Bottom Layer w0.762: VR2.2 123.952,48.387 133.223,57.658 133.223,99.06 134.366,100.203 134.366,100.339 134.992,100.965 LCD1.3
WR_ADC: IC1.3 IC3.13 | length 32.2
  Top Layer w0.508: IC1.3 98.341,101.473 99.026,100.787 99.026,100.745 102.362,97.409 v1(102.362,95.885)
  Bottom Layer w0.508: v1(102.362,95.885) 102.362,84.166 105.197,81.331 105.821,81.331 108.878,78.274 108.878,77.431 110.998,75.311 IC3.13
"XTAL 1": C12.1 IC3.18 Y1.2 | length 10.6
  Top Layer w0.762: C12.1 103.921,65.659 Y1.2 106.271,63.535 107.322,62.484 111.252,62.484 IC3.18
"XTAL 2": C13.1 IC3.19 Y1.1 | length 10.7
  Top Layer w0.762: C13.1 104.024,56.515 Y1.1 107.453,59.944 111.252,59.944 IC3.19
pads on no net: COM1.1 COM1.4 COM1.6 COM1.7 COM1.8 COM1.9 COM1.10 COM1.11 IC2.7 IC2.8 IC2.9 IC2.10 IC3.16 IC3.17 IC3.29 IC3.30 LCD1.7 LCD1.8 LCD1.9 LCD1.10 LCD1.15 LCD1.16 U1.6 U2.8 U2.9 U2.10 U2.12 U2.13 U2.14

## Silkscreen, mask and mechanical layers (free items; w line width, h text height)
Top Overlay:
  drawing of 654 lines, arcs and shapes, not listed

## Text inside footprints (layer, text, board x,y; h text height)
C2: Top Overlay "+" at 76.911,103.886 h1.2 r270
COM1: Top Overlay "6" at 68.271,64.161 h0.64 r270; Top Overlay "9" at 68.271,74.911 h0.64 r270; Top Overlay "5" at 77.771,74.911 h0.64 r270; Top Overlay "1" at 77.771,62.661 h0.64 r270